# Altium PCB PCB_Pedal.PcbDoc
Units mm, origin at the board's own origin, x right, y up, seen from the top; angles counter-clockwise.
Board outline 50 x 50 mm, 2 copper layers (Top Layer, Bottom Layer); 19 components, 11 nets, 45 pads, 0 vias.
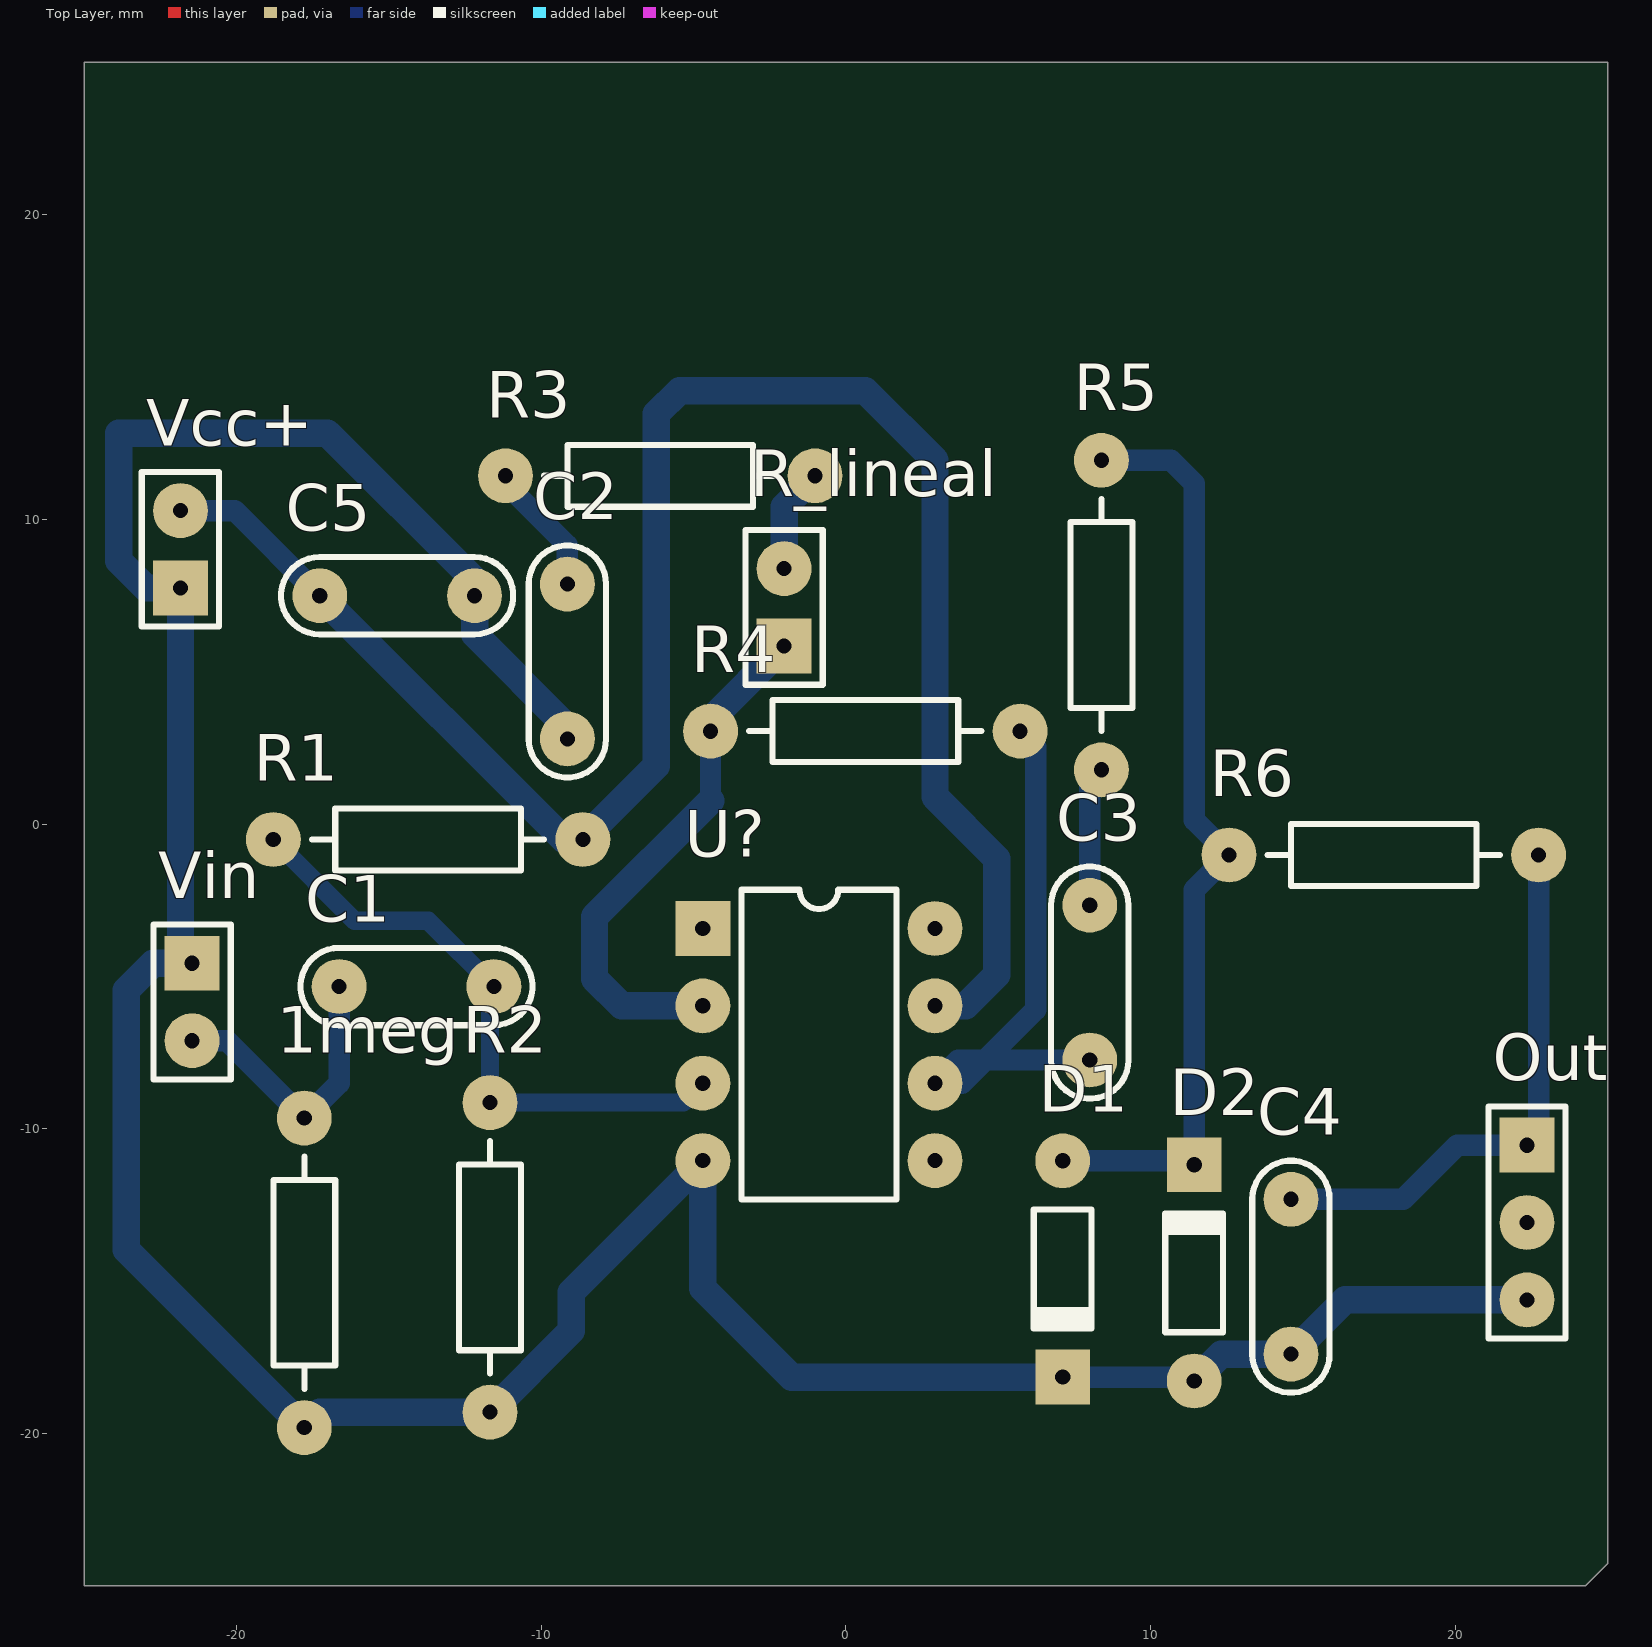
[diagram p0: Top Layer view]
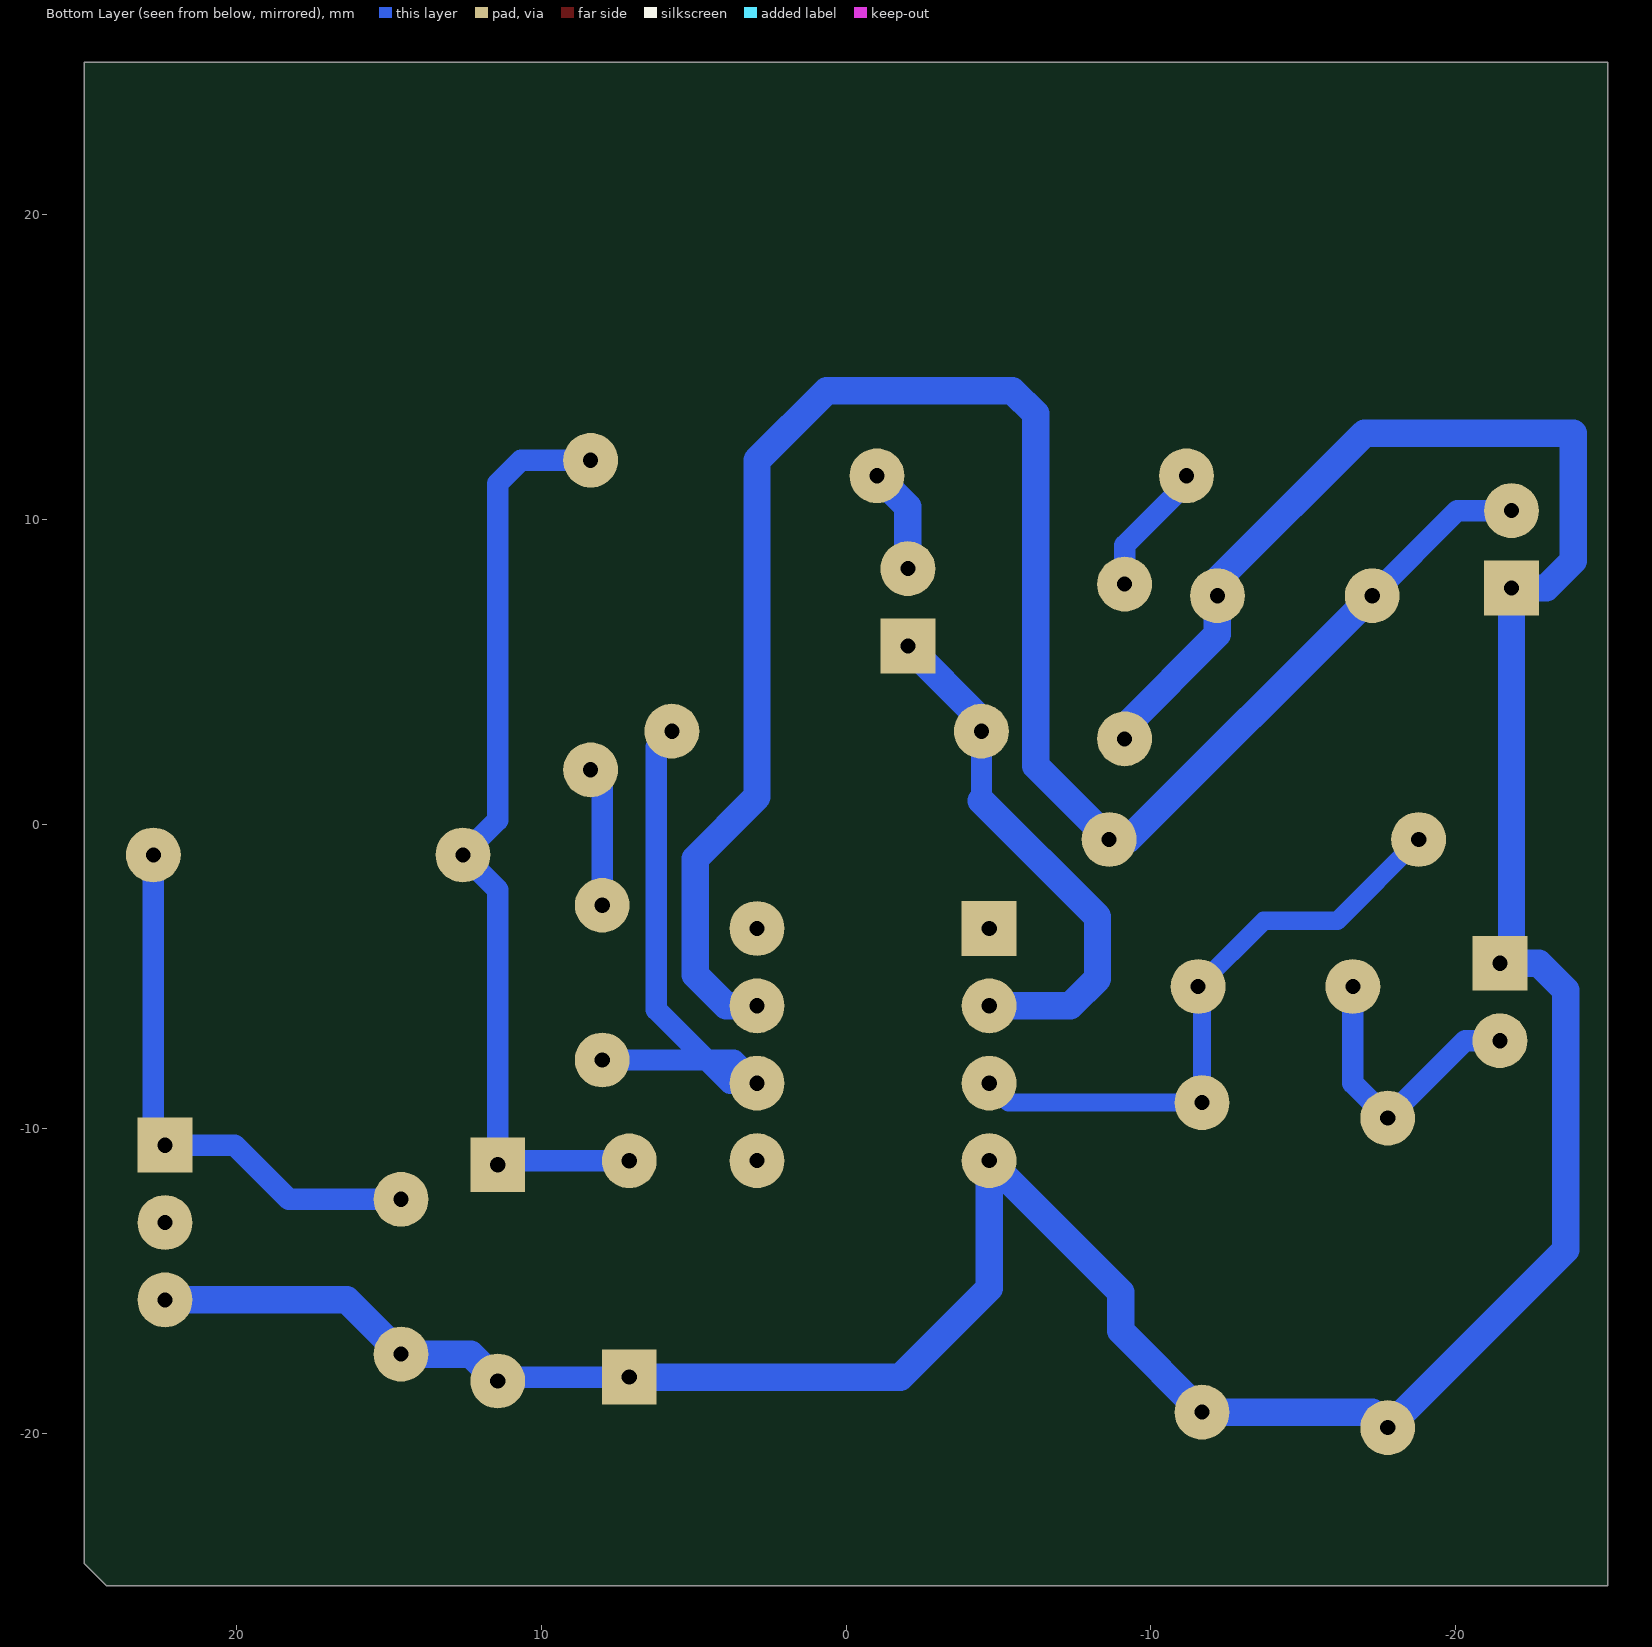
[diagram p1: Bottom Layer view, seen from below]
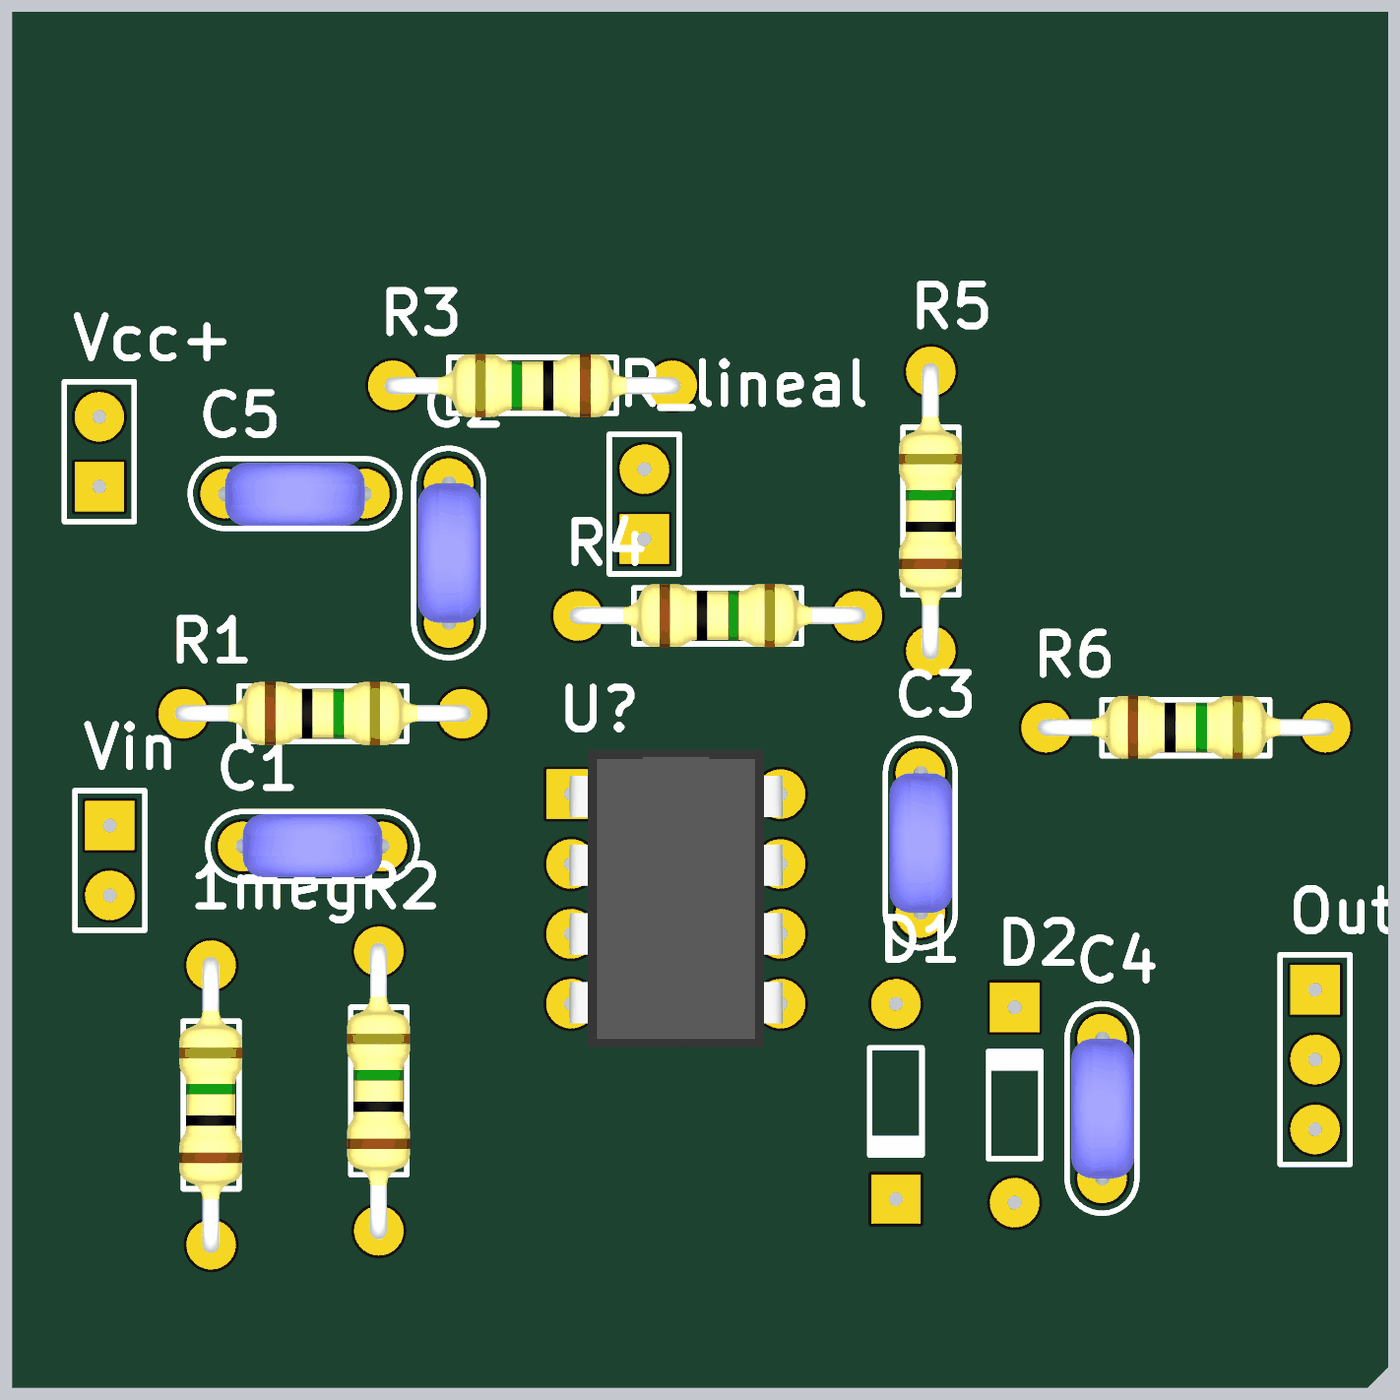
[diagram p2: 3D render of the assembled board from above, using the file's embedded part models]

## Layer stack, top to bottom
Top Solder: solder mask 0.0102, Solder Resist, Dk 3.5
Top Layer: signal copper 0.0356
Dielectric 1: dielectric 0.32, FR-4, Dk 4.8
Bottom Layer: signal copper 0.0356
Bottom Solder: solder mask 0.0102, Solder Resist, Dk 3.5

## Board outline
-25,25 25,25 25,-24.276 24.276,-25 -25,-25

## Design rules (kind name [scope] priority, off if disabled: settings)
Clearance [All] p1: gap=0.3 ignorepadtopadclearanceinfootprint=FALSE except(0: Arc-Hole Track-Hole SMDPad-Hole THPad-Hole Via-Hole Fill-Hole Poly-Hole Region-Hole Text-Hole)
PolygonConnect [All] p1: connectstyle=Relief reliefconductorwidth=0.254 reliefentries=4 polygonreliefangle="90 Angle" airgapwidth=0.254
RoutingVias [All] p1: holewidth=0.4 width=1.7 viastyle="Through Hole" minholewidth=0.3 minwidth=1.5 maxholewidth=0.5 maxwidth=2
SolderMaskExpansion [All] p1: expansion=0.102
Width [All] p1: maxlimit=0.9 minlimit=0.6 preferedwidth=0.7
30 further rules are at their usual default settings.

## Components (designator, comment, footprint, x,y, rotation, side; value= is the part's Value field where it differs from the comment)
1meg "R8" RES400 -17.78,-19.812 r90 top
C1 "1uF" CAP200 -14.097,-5.334 r180 top
C2 "1uF" CAP200 -9.144,5.334 r90 top
C3 "1uF" CAP200 8.001,-5.207 r90 top
C4 "1n" CAP200 14.605,-14.859 r90 top
C5 "1uF" CAP200 -14.732,7.493 r0 top
D1 "Diode 1N4148" DO-35 7.112,-14.605 r270 top
D2 "Diode 1N4148" DO-35 11.43,-14.732 r90 top
Out "Header 3" HDR1X3 22.352,-10.541 r270 top
R1 "47k" RES400 -18.796,-0.508 r0 top
R2 "47k" RES400 -11.684,-19.304 r90 top
R3 "10k" RES400 -1.016,11.43 r180 top
R4 "100k" RES400 -4.445,3.048 r0 top
R5 "10k" RES400 8.382,1.778 r90 top
R6 "1k" RES400 12.573,-1.016 r0 top
R_lineal "Header 2" HDR1X2 -2.032,5.842 r90 top
U? "LM741" DIP8 -4.699,-3.429 r0 top
Vcc+ "Header 2" HDR1X2 -21.844,7.747 r90 top
Vin "Header 2" HDR1X2 -21.463,-4.572 r270 top

## Footprints (in the part's own frame and the unit in brackets; to place one, negate y for a bottom-side part, rotate by r counter-clockwise, add the part's x,y. Pads: shape width x height; smd on the part's side, far side on the other; paste and mask are expansions set on the pad)
CAP200 [mm]
  round 1.8 hole 0.5: 1(-2.54,0) 2(2.54,0)
  silkscreen extent -3.81,-1.27 3.81,1.27, body extent -2.79,-1.17 2.79,1.12, height 6.24
DIP8 [mm]
  rect 1.8x1.8 hole 0.5: 1(0,0)
  round 1.8 hole 0.5: 2(0,-2.54) 3(0,-5.08) 4(0,-7.62) 5(7.62,-7.62) 6(7.62,-5.08) 7(7.62,-2.54) 8(7.62,0)
  silkscreen extent 1.27,-8.89 6.35,1.27, body extent -0.06,-9.21 7.7,1.59, height 4.5
DO-35 [mm] "Diode, Axial; Body 3.8 x 1.9 mm (LxDia. max), Lead Dia. 0.53 mm (max)"
  round 1.8 hole 0.5: 1(-3.55,0)
  rect 1.8x1.8 hole 0.5: 2(3.55,0)
  silkscreen extent -1.95,-0.95 2.05,0.95
HDR1X2 [mm] "Connector; Header; 2 Position"
  rect 1.8x1.8 hole 0.5: 1(0,0)
  round 1.8 hole 0.5: 2(2.54,0)
  silkscreen extent -1.27,-1.27 3.81,1.27
HDR1X3 [mm] "Connector; Header; 3 Position"
  rect 1.8x1.8 hole 0.5: 1(0,0)
  round 1.8 hole 0.5: 2(2.54,0) 3(5.08,0)
  silkscreen extent -1.27,-1.27 6.35,1.27
RES400 [mm]
  round 1.8 hole 0.5: 1(0,0) 2(10.16,0)
  silkscreen extent 1.27,-1.02 8.89,1.02, body extent -0.3,-1.14 10.46,1.17, height 2.43

## Part data
1meg R1 R2 R3 R4 R5 R6: library part RES
C1 C2 C3 C4 C5: library part CAP
D1 D2: "High Conductance Fast Diode", Code_JEDEC=DO-204-AH, ComponentLink1Description="Manufacturer Link", ComponentLink1URL=http://www.fairchildsemi.com/, ComponentLink2Description=Datasheet, ComponentLink2URL=http://www.fairchildsemi.com/ds/1N%2F1N4148.pdf, DatasheetVersion=1997, LatestRevisionDate=17-Jul-2002, LatestRevisionNote="Re-released for DXP Platform.", PackageDescription="Diode, Axial; Body 3.8 x 1.9 mm (LxDia. max), Lead Dia. 0.53 mm (max)", PackageReference=DO-35, Published=8-Jun-2000, Publisher="Altium Limited"
Out: "Header, 3-Pin", LatestRevisionDate=17-Jul-2002, LatestRevisionNote="Re-released for DXP Platform.", Publisher="Altium Limited"
R_lineal Vcc+ Vin: "Header, 2-Pin", LatestRevisionDate=17-Jul-2002, LatestRevisionNote="Re-released for DXP Platform.", Publisher="Altium Limited"
U?: "LM741 Operational Amplifier"

## Nets (pads, with @x,y where several pads share a name; then routed paths per layer and width w, separated by ;. In a path a pad name is that pad's centre, name@x,y a point inside that pad or via, vN(x,y) a via of type N, cw(c..) or ccw(c..) an arc to the next point about the centre after c; other vN are vias at no path point)
GND: 1meg.1 C2.1 C4.1 C5.2 D1.2 D2.1 Out.3 R2.1 U?.4 Vcc+.1 Vin.1 | length 109.6
  Bottom Layer w0.7: D1.2 11.303,-18.155 D2.1
  Bottom Layer w0.9: C2.1 -9.144,3.175 -12.192,6.223 C5.2 -12.192,8.001 -17.018,12.827 -23.876,12.827 -23.876,8.636 -22.987,7.747 Vcc+.1 -21.844,-4.191 Vin.1 -22.733,-4.572 -23.622,-5.461 -23.622,-13.97 1meg.1 -17.272,-19.304 R2.1 -9.017,-16.637 -9.017,-15.367 U?.4 -4.699,-15.24 -1.784,-18.155 D1.2 ; D2.1 12.313,-17.399 C4.1 16.383,-15.621 Out.3
Net1meg_2: 1meg.2 C1.2 Vin.2 | length 9.5
  Bottom Layer w0.7: Vin.2 -20.32,-7.112 1meg.2 -16.637,-8.509 C1.2
NetC1_1: C1.1 R1.1 R2.2 U?.3 | length 20.3
  Bottom Layer w0.6: R1.1 -16.129,-3.175 -13.716,-3.175 C1.1 -11.684,-5.461 R2.2 -5.334,-9.144 U?.3
NetC2_2: C2.2 R3.2 | length 4.4
  Bottom Layer w0.7: R3.2 -11.176,11.176 -9.144,9.144 C2.2
NetC3_1: C3.1 R4.2 U?.6 | length 19.1
  Bottom Layer w0.7: R4.2 6.223,2.54 6.223,-6.096 4.572,-7.747 ; C3.1 4.572,-7.747 ; 4.572,-7.747 3.81,-8.509 U?.6 3.683,-7.747 4.572,-7.747
NetC3_2: C3.2 R5.1 | length 4.6
  Bottom Layer w0.7: C3.2 8.001,1.397 R5.1
NetC4_2: C4.2 Out.1 R6.2 | length 18.2
  Bottom Layer w0.7: C4.2 18.288,-12.319 20.066,-10.541 Out.1 22.733,-10.16 R6.2
NetD1_1: D1.1 D2.2 R5.2 R6.1 | length 31
  Bottom Layer w0.7: D1.1 11.303,-11.055 D2.2 11.43,-2.159 R6.1 11.43,0.127 11.43,11.176 10.668,11.938 R5.2
NetLabel1: C5.1 R1.2 U?.7 Vcc+.2 | length 63.2
  Bottom Layer w0.7: Vcc+.2 -20.066,10.287 C5.1
  Bottom Layer w0.9: C5.1 -9.271,-0.508 R1.2 -6.223,1.905 -6.223,13.462 -5.461,14.224 0.635,14.224 2.921,11.938 2.921,0.889 4.953,-1.143 4.953,-4.953 3.937,-5.969 U?.7
NetR3_1: R3.1 R_lineal.2 | length 3.5
  Bottom Layer w0.9: R_lineal.2 -2.032,10.414 R3.1
NetR4_1: R4.1 R_lineal.1 U?.2 | length 17.4
  Bottom Layer w0.7: -4.445,0.762 R4.1
  Bottom Layer w0.9: U?.2 -7.366,-5.969 -8.255,-5.08 -8.255,-3.048 -4.445,0.762 ; R4.1 -4.445,3.429 R_lineal.1
pads on no net: Out.2 U?.1 U?.5 U?.8